# EAGLE board ECE_362_mini_project2 (EAGLE 7.5.0)
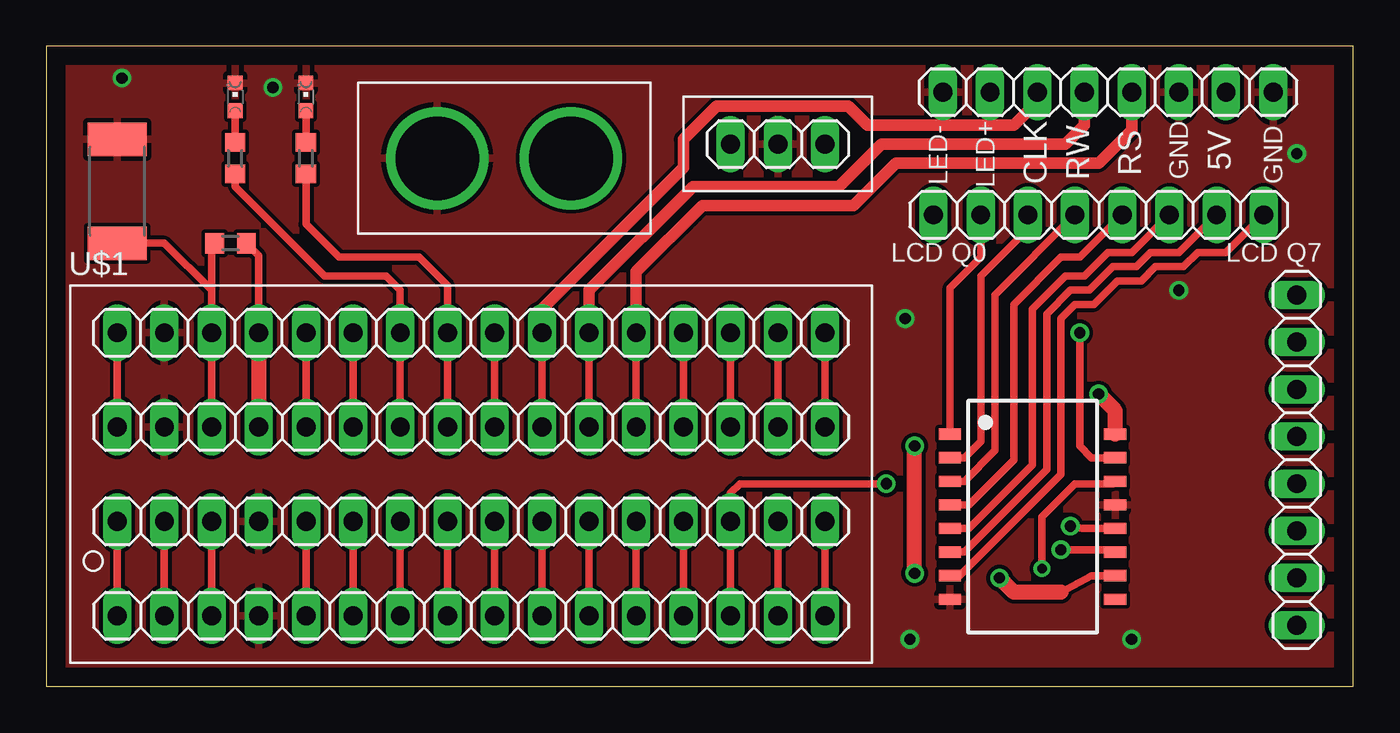
[diagram p0: board, top side]
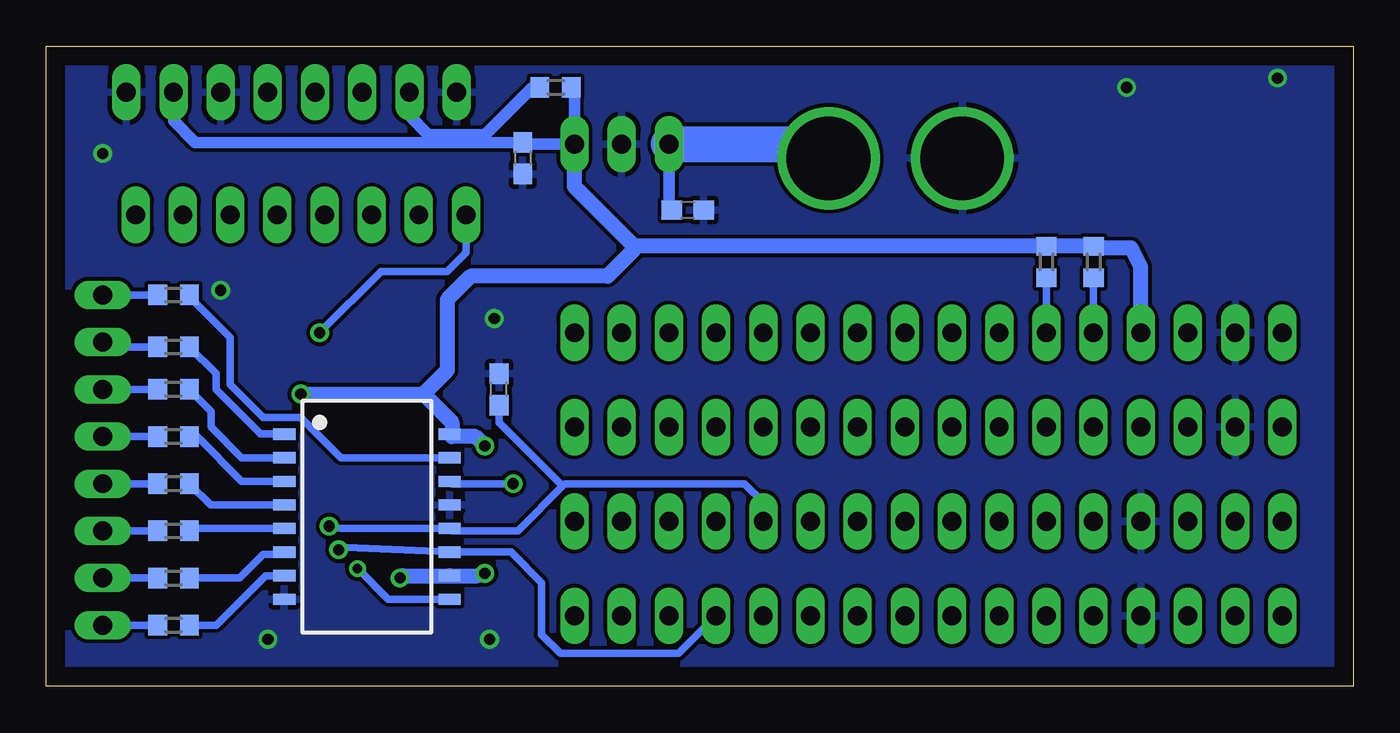
[diagram p1: board, bottom side, seen from below]

Size 70.34 x 34.47 mm. Coordinates in mm from the lower left corner, seen from the top.
Outline: 0,0 70.34,0 70.34,34.47 0,34.47 0,0
Copper layers (1*16): Top 0.035mm / dielectric 1.5mm / Bottom 0.035mm
Design rules "default": minimum track width 10mil, minimum drill 24mil, track to track 8mil, track to pad 8mil, pad to pad 8mil, via to via 8mil, smd to smd 8mil, copper to edge 40mil, drill to drill 8mil, minimum pad ring 10mil, minimum via ring 8mil, stop-mask expansion 4mil, vias tented up to drill 0mil, thermal gap 10mil

## Footprints (pad centres in the part's own frame; a part is rotated, then mirrored left to right if it is on the bottom)
SW_2512 = smd 1.8 x 3.2: 1 -2.8,0; 2 2.8,0
C0603 = smd 1.1 x 1: 1 -0.85,0; 2 0.85,0
1X16 = drill 1.016 long: 1 -19.05,0; 2 -16.51,0; 3 -13.97,0; 4 -11.43,0; 5 -8.89,0; 6 -6.35,0; 7 -3.81,0; 8 -1.27,0; 9 1.27,0; 10 3.81,0; 11 6.35,0; 12 8.89,0; 13 11.43,0; 14 13.97,0; 15 16.51,0; 16 19.05,0
1X08 = drill 1.016 long: 1 -8.89,0; 2 -6.35,0; 3 -3.81,0; 4 -1.27,0; 5 1.27,0; 6 3.81,0; 7 6.35,0; 8 8.89,0
CHIPLED_0603 = smd 0.8 x 0.8: A 0,-0.75; C 0,0.75
R0603 = smd 1 x 1.1: 1 -0.85,0; 2 0.85,0
MICRO_CONTROLLER = drill 1.016 long: 1 0,0; 2 2.54,0; 3 5.08,0; 4 7.62,0; 5 10.16,0; 6 12.7,0; 7 15.24,0; 8 17.78,0; 9 20.32,0; 10 22.86,0; 11 25.4,0; 12 27.94,0; 13 30.48,0; 14 33.02,0; 15 35.56,0; 16 38.1,0; 17 38.1,15.24; 18 35.56,15.24; 19 33.02,15.24; 20 30.48,15.24; 21 27.94,15.24; 22 25.4,15.24; 23 22.86,15.24; 24 20.32,15.24; 25 17.78,15.24; 26 15.24,15.24; 27 12.7,15.24; 28 10.16,15.24; 29 7.62,15.24; 30 5.08,15.24; 31 2.54,15.24; 32 0,15.24
N5 = smd 0.6 x 1.2: 1 -4.445,-4.445; 2 -3.175,-4.445; 3 -1.905,-4.445; 4 -0.635,-4.445; 5 0.635,-4.445; 6 1.905,-4.445; 7 3.175,-4.445; 8 4.445,-4.445; 9 4.445,4.445; 10 3.175,4.445; 11 1.905,4.445; 12 0.635,4.445; 13 -0.635,4.445; 14 -1.905,4.445; 15 -3.175,4.445; 16 -4.445,4.445
XT60 = drill 4.5 pad 5: P$1 0,3.6; P$2 0,-3.6
L7805CV = drill 1.016 long: 1 2.54,2.54; 2 5.08,2.54; 3 7.62,2.54

## Placement (x,y rotation side)
BOOT_SW  SWITCH  [SW_2512]  3.81,26.67 90 top
C1  0.1u  [C0603]  35.81,25.65 180 bottom
C2  0.1u  [C0603]  44.7,28.45 270 bottom
C3  0.1u  [C0603]  45.97,16 90 bottom
JP1  [1X16]  22.86,8.89 0 top
JP2  [1X16]  22.86,13.97 0 top
JP3  [1X08]  67.31,12.19 270 top
JP5  [1X08]  56.64,25.4 0 top
JP6  [1X08]  57.15,32 180 top
LED1  [CHIPLED_0603]  10.16,31.75 0 top
LED2  [CHIPLED_0603]  13.97,31.75 0 top
R1  [R0603]  10.16,28.45 90 top
R2  [R0603]  13.97,28.45 90 top
R3  10k  [R0603]  13.97,22.86 90 bottom
R4  10k  [R0603]  16.51,22.86 90 bottom
R5  220  [R0603]  42.93,32.26 180 bottom
R6  220  [R0603]  63.5,18.29 180 bottom
R7  220  [R0603]  63.5,16 180 bottom
R8  220  [R0603]  63.5,13.46 180 bottom
R9  220  [R0603]  63.5,10.92 180 bottom
R10  220  [R0603]  63.5,8.38 180 bottom
R11  220  [R0603]  63.5,5.84 180 bottom
R12  220  [R0603]  63.5,3.3 180 bottom
R13  220  [R0603]  9.91,23.88 0 top
R20  220  [R0603]  63.5,21.08 180 bottom
U$1  MICRO_CONTROLLER  [MICRO_CONTROLLER]  3.81,3.81 0 top
U$2  SHIFT_REGISTER  [N5]  53.09,9.14 270 bottom
U$3  XT60  [XT60]  24.64,28.45 90 top
U$5  SHIFT_REGISTER  [N5]  53.09,9.14 270 top
U$6  L7805CV  [L7805CV]  34.29,26.67 0 top

## Library data of the parts
BOOT_SW = MicroBoard
C1-C3 = eagle-ltspice; SPICEMODEL: NONE; SPICEPREFIX: C
JP1 JP2 U$1-U$3 U$5 U$6 = mini_project_parts
JP3 JP5 JP6 = pinhead
LED1 LED2 = led
R1-R13 R20 = resistor

## Nets
+5V: C2.1 JP2.4 JP6.2 R3.2 R4.2 R5.1 R13.2 U$1.29 U$2.10 U$2.16 U$5.10 U$5.16 U$6.3
A0: R20.1 U$2.15
A1: R6.1 U$2.1
A2: R7.1 U$2.2
A3: R8.1 U$2.3
A4: R9.1 U$2.4
A5: R10.1 U$2.5
A7: R12.1 U$2.7
AN0: JP1.5 U$1.5
AN1: JP1.6 U$1.6
AN2: JP1.7 U$1.7
AN3: JP1.8 U$1.8
AN4: JP1.9 U$1.9
AN5: JP1.10 U$1.10
AN6: JP1.11 U$1.11
AN7: C3.1 JP1.12 U$1.12 U$2.12 U$5.12
DTR: JP1.3 U$1.3
GND: BOOT_SW.2 C1.1 C2.2 C3.2 JP1.4 JP2.2 JP6.1 JP6.3 JP6.8 LED1.C LED2.C U$1.4 U$1.31 U$2.8 U$2.13 U$3.P$1 U$5.8 U$5.13 U$6.2
LCD_Q0: JP5.1 U$5.15
LCD_Q1: JP5.2 U$5.1
LCD_Q2: JP5.3 U$5.2
LCD_Q3: JP5.4 U$5.3
LCD_Q4: JP5.5 U$5.4
LCD_Q5: JP5.6 U$5.5
LCD_Q6: JP5.7 U$5.6
LCD_Q7: JP5.8 U$5.7
LED1_Q0: JP3.1 R20.2
LED1_Q1: JP3.2 R6.2
LED1_Q2: JP3.3 R7.2
LED1_Q3: JP3.4 R8.2
LED1_Q4: JP3.5 R9.2
LED1_Q5: JP3.6 R10.2
LED1_Q6: JP3.7 R11.2
LED1_Q7: JP3.8 R12.2
N$1: LED1.A R1.2
N$2: LED2.A R2.2
N$3: R11.1 U$2.6
N$4: U$2.9 U$5.14
N$9: JP6.7 R5.2
PE0: JP2.5 R3.1 U$1.28
PE1: JP2.6 R4.1 U$1.27
PM0: JP2.15 U$1.18
PM1: JP2.16 U$1.17
PM2: JP1.16 U$1.16
PM3: JP1.15 U$1.15
PM4: JP1.14 U$1.14 U$2.14
PM5: JP1.13 U$1.13 U$2.11 U$5.11
PT0: JP2.14 U$1.19
PT1: JP2.13 U$1.20
PT2: JP2.12 JP6.4 U$1.21
PT3: JP2.11 JP6.5 U$1.22
PT4: JP2.10 JP6.6 U$1.23
PT5: JP2.9 U$1.24
PT6: JP2.8 R2.1 U$1.25
PT7: JP2.7 R1.1 U$1.26
RESET: BOOT_SW.1 JP2.3 R13.1 U$1.30
RX: JP1.2 U$1.2
TX: JP1.1 U$1.1
V+: C1.2 U$3.P$2 U$6.1
VIN: JP2.1 U$1.32

## Tracks (layer width: path | path; a pad name or v marks a point on that pad's centre or on a via)
+5V  (via drill 0.6)
  Top 0.406: U$5.10 56.26,5.97 54.61,5.08 | R13.2 11.43,23.2 U$1.29
  Top 0.813: U$1.29 JP2.4 | U$5.16 57.53,14.86 v56.64,15.75 | 54.61,5.08 52.07,5.08 v51.31,5.84 | v46.74,6.1 v46.74,12.95
  Bottom 0.406: 38.7,23.71 38.7,23.53 | 48.77,13.72 U$2.16 | 48.51,13.72 U$2.16 | 48.51,13.46 U$2.16
  Bottom 0.61: R5.1 41.91,32.09 U$6.3 44.62,29.21 C2.1 62.32,29.3 63.5,30.48 JP6.2
  Bottom 0.813: U$1.29 11.43,22.61 11.94,23.62 13.88,23.62 R3.2 R4.2 38.7,23.71 41.91,26.92 U$6.3 | 38.7,23.53 40.13,22.1 47.5,22.1 48.77,20.83 48.77,17.02 50.04,15.75 | v56.64,15.75 50.04,15.75 | 50.04,15.75 48.51,14.22 48.51,13.72 | v51.31,5.84 51.18,5.97 U$2.10 47.12,5.97 v46.74,6.1 | v46.74,12.95 47.24,13.46 48.51,13.46
A0
  Bottom 0.406: U$2.15 54.48,12.32 56.64,14.48 58.67,14.48 60.45,16.26 60.45,18.8 62.65,20.99 R20.1
A1
  Bottom 0.406: U$2.1 58.8,13.59 61.21,16 61.21,16.85 R6.1
A2
  Bottom 0.406: R7.1 61.47,14.82 61.47,13.97 59.82,12.32 U$2.2
A3
  Bottom 0.406: U$2.3 59.82,11.05 62.23,13.46 R8.1
A4
  Bottom 0.406: U$2.4 61.51,9.78 R9.1
A5
  Bottom 0.406: U$2.5 62.52,8.51 R10.1
A7
  Bottom 0.406: U$2.7 58.55,5.97 61.21,3.3 R12.1
AN0
  Top 0.406: JP1.5 U$1.5
AN1
  Top 0.406: JP1.6 U$1.6
AN2
  Top 0.406: JP1.7 U$1.7
AN3
  Top 0.406: JP1.8 U$1.8
AN4
  Top 0.406: JP1.9 U$1.9
AN5
  Top 0.406: JP1.10 U$1.10
AN6
  Top 0.406: JP1.11 U$1.11
AN7  (via drill 0.6)
  Top 0.406: JP1.12 U$1.12 | U$5.12 55.75,8.51 v55.12,8.64
  Bottom 0.406: JP1.12 31.75,9.91 32.77,10.92 42.42,10.92 42.55,10.79 | 42.55,10.79 44.96,8.38 48.51,8.38 U$2.12 54.48,8.51 v55.12,8.64 | C3.1 45.97,14.22 42.55,10.79
DTR
  Top 0.406: JP1.3 U$1.3
GND  (via drill 0.6)
  other vias: 46.23,19.81 60.96,21.34 58.42,2.54 46.48,2.54 67.31,28.7 12.19,32.26 4.06,32.77
  pour Bottom: -3.3,-1.02 70.61,0 71.63,36.32 -0.76,36.32
  pour Top: -0.25,34.54 71.12,35.31 70.61,0 -0.76,0.25
LCD_Q0  (via drill 0.6)
  Top 0.406: U$5.15 56.26,12.32 55.63,12.95 v55.63,19.05
  Bottom 0.406: v55.63,19.05 52.32,22.35 48.77,22.35 47.75,23.37 JP5.1
LCD_Q1
  Top 0.406: U$5.1 48.64,21.46 50.29,23.11 JP5.2
LCD_Q2
  Top 0.406: U$5.2 49.4,12.32 50.29,13.21 50.29,22.1 52.83,24.64 JP5.3
LCD_Q3
  Top 0.406: U$5.3 49.4,11.05 51.05,12.7 51.05,21.08 JP5.4
LCD_Q4
  Top 0.406: U$5.4 49.66,9.78 52.07,12.19 52.07,20.57 54.61,23.11 55.63,23.11 JP5.5
LCD_Q5
  Top 0.406: U$5.5 49.66,8.51 53.09,11.94 53.09,20.32 54.86,22.1 55.88,22.1 57.15,23.37 58.42,23.37 JP5.6
LCD_Q6
  Top 0.406: U$5.6 49.4,7.24 53.85,11.68 53.85,20.07 55.12,21.34 56.13,21.34 57.4,22.61 58.67,22.61 59.44,23.37 60.96,23.37 JP5.7
LCD_Q7
  Top 0.406: U$5.7 49.15,5.97 54.61,11.43 54.61,19.81 55.37,20.57 56.39,20.57 57.66,21.84 58.93,21.84 59.69,22.61 61.21,22.61 61.98,23.37 63.5,23.37 JP5.8
LED1_Q0
  Bottom 0.406: R20.2 JP3.1
LED1_Q1
  Bottom 0.406: R6.2 67.06,18.29 JP3.2
LED1_Q2
  Bottom 0.406: R7.2 JP3.3
LED1_Q3
  Bottom 0.406: R8.2 JP3.4
LED1_Q4
  Bottom 0.406: R9.2 JP3.5
LED1_Q5
  Bottom 0.406: R10.2 JP3.6
LED1_Q6
  Bottom 0.406: R11.2 JP3.7
LED1_Q7
  Bottom 0.406: R12.2 JP3.8
N$1
  Top 0.406: LED1.A R1.2
N$2
  Top 0.406: LED2.A R2.2
N$3
  Bottom 0.406: R11.1 59.94,5.84 58.67,7.11 57.66,7.11 U$2.6
N$4  (via drill 0.5)
  Top 0.406: v53.59,6.35 53.59,9.14 55.37,10.92 57.4,10.92 U$5.14
  Bottom 0.406: U$2.9 51.94,4.7 v53.59,6.35
N$9
  Bottom 0.61: R5.2 44.2,32.26 46.74,29.72 49.78,29.72 50.8,30.73 JP6.7
PE0
  Top 0.406: U$1.28 JP2.5
  Bottom 0.406: U$1.28 R3.1
PE1
  Top 0.406: U$1.27 JP2.6
  Bottom 0.406: U$1.27 R4.1
PM0
  Top 0.406: U$1.18 JP2.15
PM1
  Top 0.406: U$1.17 JP2.16
PM2
  Top 0.406: JP1.16 U$1.16
PM3
  Top 0.406: JP1.15 U$1.15
PM4  (via drill 0.6)
  Top 0.406: U$1.14 JP1.14 36.83,10.41 37.34,10.92 v45.21,10.92
  Bottom 0.406: v45.21,10.92 48.51,10.92 U$2.14
PM5  (via drill 0.6)
  Top 0.406: JP1.13 U$1.13 | v54.61,7.37 57.4,7.37 U$5.11
  Bottom 0.406: U$1.13 36.32,1.78 42.67,1.78 43.69,2.79 43.69,5.59 45.34,7.24 U$2.11 54.23,7.49 v54.61,7.37
PT0
  Top 0.406: U$1.19 JP2.14
PT1
  Top 0.406: U$1.20 JP2.13
PT2
  Top 0.406: U$1.21 JP2.12
  Top 0.61: U$1.21 31.75,22.35 35.31,25.91 43.43,25.91 45.72,28.19 56.64,28.19 58.42,29.97 JP6.4
PT3
  Top 0.406: U$1.22 JP2.11
  Top 0.61: U$1.22 29.21,21.34 34.8,26.92 42.67,26.92 44.96,29.21 54.86,29.21 55.88,30.23 JP6.5
PT4
  Top 0.406: U$1.23 JP2.10
  Top 0.61: U$1.23 26.67,20.32 34.29,27.94 34.29,29.46 36.07,31.24 43.18,31.24 44.2,30.23 52.07,30.23 53.34,31.5 JP6.6
PT5
  Top 0.406: U$1.24 JP2.9
PT6
  Top 0.406: JP2.8 U$1.25 21.59,21.59 20.07,23.11 15.75,23.11 13.97,24.89 R2.1
PT7
  Top 0.406: JP2.7 U$1.26 19.05,21.34 18.29,22.1 14.99,22.1 10.16,26.92 R1.1
RESET
  Top 0.406: JP2.3 U$1.30 8.89,21.34 | 8.89,21.34 6.35,23.88 BOOT_SW.1 | R13.1 8.89,23.88 8.89,21.34
RX
  Top 0.406: JP1.2 U$1.2
TX
  Top 0.406: JP1.1 U$1.1
V+
  Bottom 0.61: U$6.1 36.83,25.57 C1.2
  Bottom 1.93: U$6.1 29,29.21 U$3.P$2
VIN
  Top 0.406: U$1.32 JP2.1

## Text on the board
tSilk: LED- | LED+ | CLK | RW | RS | GND | 5V | GND | LCD Q0 | LCD Q7